# Altium PCB Rev5.PcbDoc (part 2 of 4)
Units mil, origin at the board's own origin, x right, y up, seen from the top; angles counter-clockwise.
Board outline 3019 x 2316 mil, 2 copper layers (Top Layer, Bottom Layer); 26 components, 37 nets, 159 pads, 132 vias.
Unrouted connection lines stored in the file: 2.
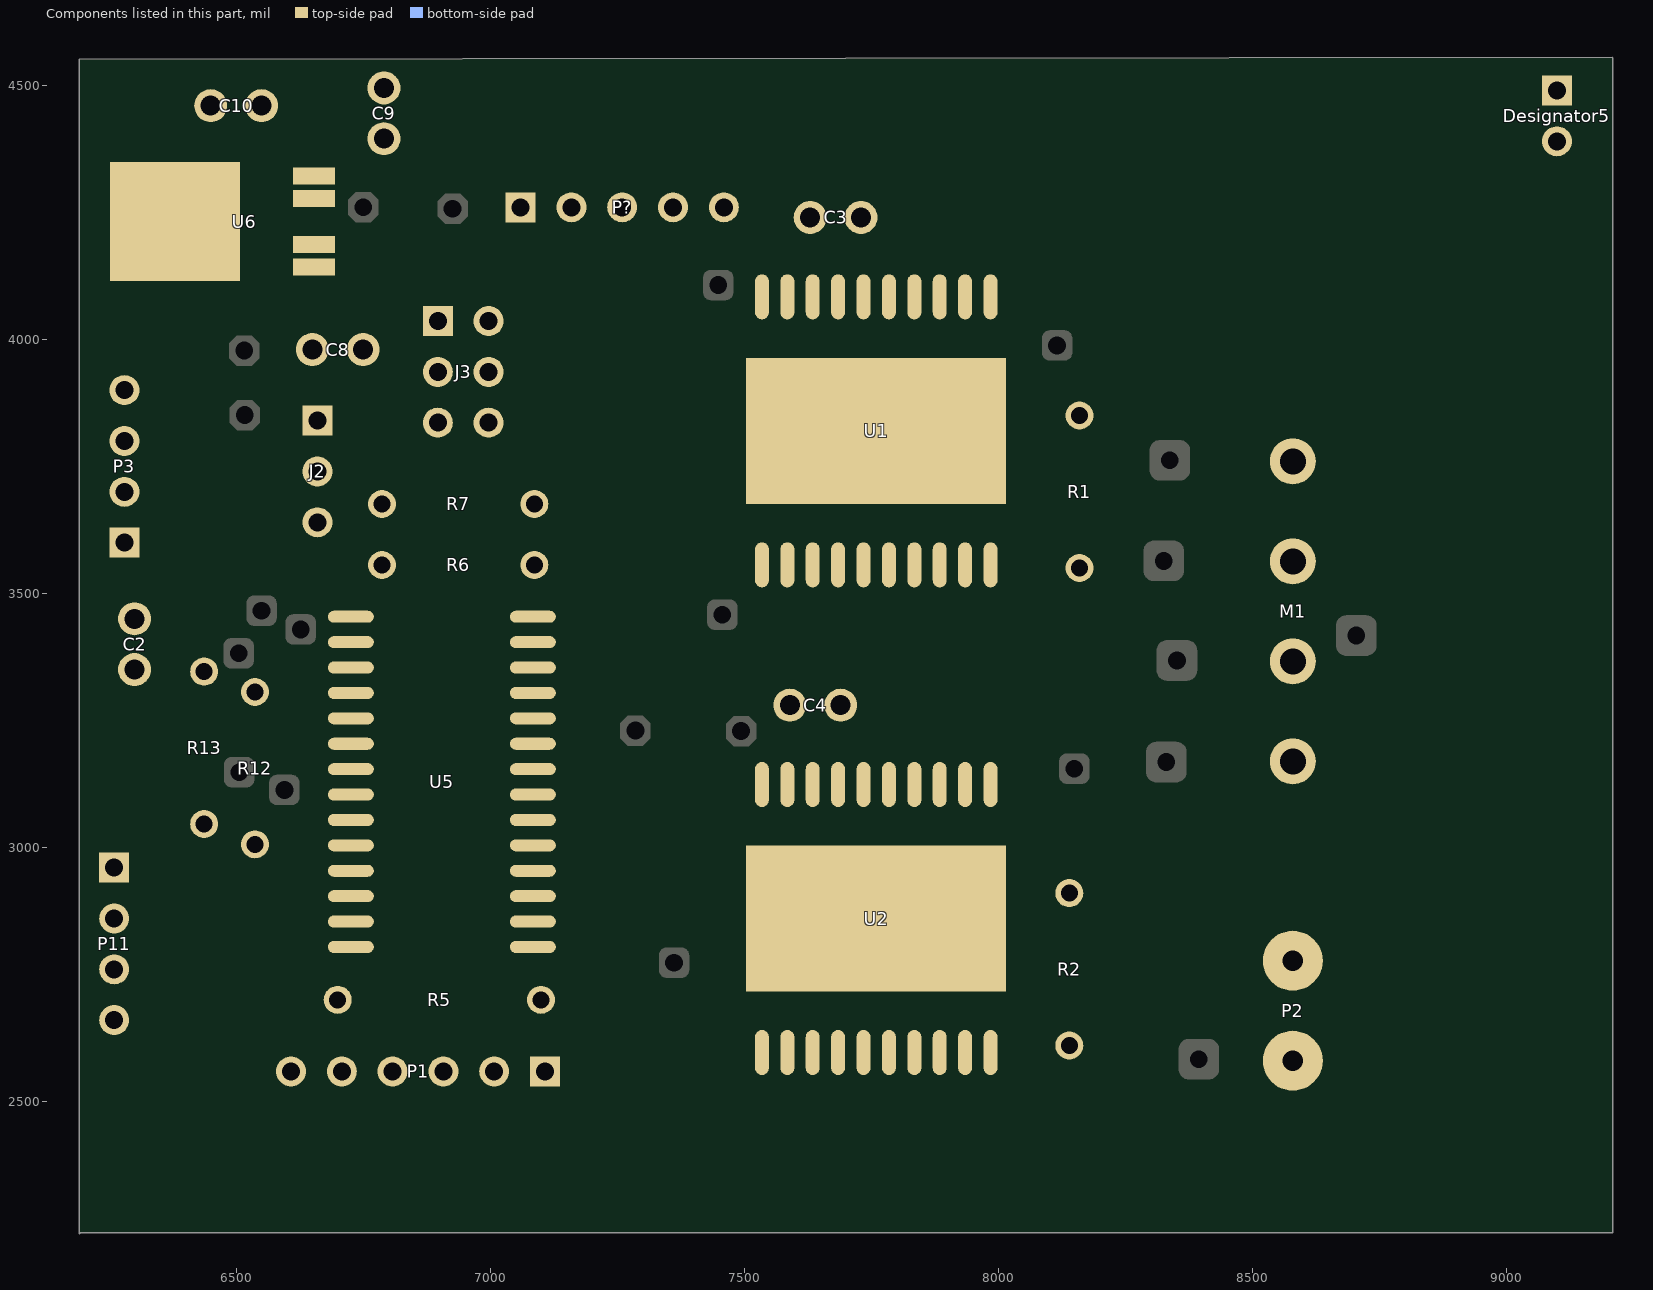
[diagram p2: the components of this part, seen from the top]

## Via types
v1: diameter 25.98, hole 12.99, Top Layer to Bottom Layer, tented top, 132 vias

## Nets (pads, with @x,y where several pads share a name; then routed paths per layer and width w, separated by ;. In a path a pad name is that pad's centre, name@x,y a point inside that pad or via, vN(x,y) a via of type N, cw(c..) or ccw(c..) an arc to the next point about the centre after c; other vN are vias at no path point) (continued)
copper on no net: | length 118851.7
  Top Layer w3: 8278.5,4156.5 8281,4156.5 ; 8278.5,4159 8283.5,4159 ; 8281,4161.5 8286,4161.5 ; 8283.5,4164 8291,4164 ; 8286,4166.5 8293.5,4166.5 ; 8288.5,4169 8296,4169 ; 8293.5,4171.5 8298.5,4171.5 ; 8296,4174 8303.5,4174 ; 8298.5,4176.5 8306,4176.5 ; 8301,4179 8308.5,4179 ; 8303.5,4181.5 8308.5,4181.5 ; 8306,4184 8311,4184 ; 8306,4186.5 8313.5,4186.5 ; 8308.5,4189 8313.5,4189 ; 8308.5,4191.5 8313.5,4191.5 ; 8311,4194 8316,4194 ; 8311,4196.5 8316,4196.5 ; 8311,4199 8316,4199 ; 8313.5,4201.5 8318.5,4201.5 ; 8313.5,4204 8318.5,4204 ; 8313.5,4206.5 8321,4206.5 ; 8316,4209 8321,4209 ; 8318.5,4211.5 8331,4211.5 ; 8318.5,4214 8328.5,4214 ; 8321,4216.5 8326,4216.5 ; 8323.5,4219 8331,4219 ; 8326,4209 8333.5,4209 ; 8326,4221.5 8353.5,4221.5 ; 8328.5,4206.5 8338.5,4206.5 ; 8328.5,4224 8343.5,4224 ; 8333.5,4204 8341,4204 ; 8336,4159 8343.5,4159 ; 8336,4161.5 8341,4161.5 ; 8336,4164 8341,4164 ; 8336,4166.5 8341,4166.5 ; 8336,4169 8341,4169 ; 8336,4171.5 8341,4171.5 ; 8336,4174 8343.5,4174 ; 8336,4201.5 8346,4201.5 ; 8336,4226.5 8341,4226.5 ; 8338.5,4156.5 8343.5,4156.5 ; 8338.5,4176.5 8343.5,4176.5 ; 8338.5,4179 8343.5,4179 ; 8338.5,4181.5 8346,4181.5 ; 8338.5,4199 8346,4199 ; 8338.5,4209 8341,4209 ; 8341,4154 8346,4154 ; 8341,4184 8346,4184 ; 8341,4186.5 8346,4186.5 ; 8341,4189 8348.5,4189 ; 8341,4196.5 8348.5,4196.5 ; 8341,4211.5 8343.5,4211.5 ; 8343.5,4151.5 8348.5,4151.5 ; 8343.5,4191.5 8348.5,4191.5 ; 8343.5,4194 8348.5,4194 ; 8343.5,4214 8346,4214 ; 8343.5,4216.5 8348.5,4216.5 ; 8343.5,4219 8351,4219 ; 8346,4149 8353.5,4149 ; 8348.5,4146.5 8361,4146.5 ; 8351,4224 8356,4224 ; 8353.5,4144 8368.5,4144 ; 8353.5,4226.5 8358.5,4226.5 ; 8356,4229 8361,4229 ; 8358.5,4141.5 8383.5,4141.5 ; 8358.5,4231.5 8361,4231.5 ; 8361,4234 8363.5,4234 ; 8361,4236.5 8366,4236.5 ; 8363.5,4239 8368.5,4239 ; 8366,4241.5 8371,4241.5 ; 8368.5,4244 8373.5,4244 ; 8371,4139 8411,4139 ; 8371,4246.5 8376,4246.5 ; 8373.5,4249 8378.5,4249 ; 8376,4251.5 8381,4251.5 ; 8378.5,4254 8386,4254 ; 8383.5,4256.5 8388.5,4256.5 ; 8386,4259 8391,4259 ; 8388.5,4024 8393.5,4024 ; 8388.5,4026.5 8393.5,4026.5 ; 8388.5,4261.5 8393.5,4261.5 ; 8391,4029 8396,4029 ; 8391,4031.5 8396,4031.5 ; 8391,4034 8396,4034 ; 8391,4136.5 8396,4136.5 ; 8391,4264 8396,4264 ; 8393.5,4036.5 8396,4036.5 ; 8393.5,4039 8398.5,4039 ; 8393.5,4041.5 8398.5,4041.5 ; 8393.5,4044 8398.5,4044 ; 8393.5,4266.5 8398.5,4266.5 ; 8396,4046.5 8398.5,4046.5 ; 8396,4049 8401,4049 ; 8396,4051.5 8401,4051.5 ; 8396,4054 8401,4054 ; 8396,4056.5 8401,4056.5 ; 8396,4059 8401,4059 ; 8396,4269 8401,4269 ; 8398.5,4061.5 8401,4061.5 ; 8398.5,4064 8403.5,4064 ; 8398.5,4066.5 8403.5,4066.5 ; 8398.5,4069 8403.5,4069 ; 8398.5,4071.5 8403.5,4071.5 ; 8398.5,4074 8403.5,4074 ; 8398.5,4076.5 8403.5,4076.5 ; 8398.5,4079 8403.5,4079 ; 8398.5,4081.5 8403.5,4081.5 ; 8398.5,4084 8403.5,4084 ; 8398.5,4086.5 8403.5,4086.5 ; 8398.5,4089 8403.5,4089 ; 8398.5,4091.5 8403.5,4091.5 ; 8398.5,4094 8403.5,4094 ; 8398.5,4096.5 8403.5,4096.5 ; 8398.5,4099 8403.5,4099 ; 8398.5,4101.5 8403.5,4101.5 ; 8398.5,4104 8403.5,4104 ; 8398.5,4106.5 8403.5,4106.5 ; 8398.5,4109 8411,4109 ; 8398.5,4111.5 8403.5,4111.5 ; 8398.5,4114 8401,4114 ; 8398.5,4116.5 8401,4116.5 ; 8398.5,4119 8403.5,4119 ; 8398.5,4121.5 8403.5,4121.5 ; 8398.5,4124 8403.5,4124 ; 8398.5,4126.5 8403.5,4126.5 ; 8398.5,4129 8403.5,4129 ; 8398.5,4271.5 8401,4271.5 ; 8398.5,4274 8403.5,4274 ; 8401,4131.5 8406,4131.5 ; 8401,4276.5 8406,4276.5 ; 8401,4279 8406,4279 ; 8403.5,4134 8406,4134 ; 8403.5,4136.5 8408.5,4136.5 ; 8403.5,4281.5 8406,4281.5 ; 8403.5,4284 8408.5,4284 ; 8406,4106.5 8421,4106.5 ; 8406,4141.5 8411,4141.5 ; 8406,4286.5 8408.5,4286.5 ; 8406,4289 8411,4289 ; 8406,4291.5 8411,4291.5 ; 8408.5,4144 8413.5,4144 ; 8408.5,4294 8413.5,4294 ; 8408.5,4296.5 8413.5,4296.5 ; 8411,4146.5 8413.5,4146.5 ; 8411,4299 8416,4299 ; 8413.5,4104 8433.5,4104 ; 8413.5,4149 8416,4149 ; 8413.5,4151.5 8416,4151.5 ; 8413.5,4301.5 8416,4301.5 ; 8413.5,4304 8418.5,4304 ; 8416,4154 8418.5,4154 ; 8416,4156.5 8418.5,4156.5 ; 8416,4306.5 8421,4306.5 ; 8416,4309 8421,4309 ; 8418.5,4159 8421,4159 ; 8418.5,4161.5 8423.5,4161.5 ; 8418.5,4311.5 8423.5,4311.5 ; 8418.5,4314 8423.5,4314 ; 8421,4164 8423.5,4164 ; 8421,4316.5 8426,4316.5 ; 8421,4319 8426,4319 ; 8423.5,4106.5 8441,4106.5 ; 8423.5,4166.5 8426,4166.5 ; 8423.5,4169 8428.5,4169 ; 8423.5,4321.5 8428.5,4321.5 ; 8423.5,4324 8428.5,4324 ; 8426,4171.5 8428.5,4171.5 ; 8426,4174 8431,4174 ; 8426,4326.5 8431,4326.5 ; 8426,4329 8431,4329 ; 8428.5,4176.5 8431,4176.5 ; 8428.5,4179 8433.5,4179 ; 8428.5,4331.5 8433.5,4331.5 ; 8428.5,4334 8433.5,4334 ; 8428.5,4336.5 8433.5,4336.5 ; 8431,4181.5 8433.5,4181.5 ; 8431,4184 8436,4184 ; 8431,4339 8436,4339 ; 8431,4341.5 8436,4341.5 ; 8433.5,4109 8446,4109 ; 8433.5,4186.5 8436,4186.5 ; 8433.5,4189 8438.5,4189 ; 8433.5,4344 8438.5,4344 ; 8433.5,4346.5 8438.5,4346.5 ; 8436,4191.5 8438.5,4191.5 ; 8436,4194 8441,4194 ; 8436,4349 8441,4349 ; 8436,4351.5 8441,4351.5 ; 8438.5,4196.5 8443.5,4196.5 ; 8438.5,4354 8443.5,4354 ; 8438.5,4356.5 8443.5,4356.5 ; 8441,4111.5 8466,4111.5 ; 8441,4199 8443.5,4199 ; 8441,4201.5 8446,4201.5 ; 8441,4359 8446,4359 ; 8443.5,4204 8448.5,4204 ; 8443.5,4206.5 8451,4206.5 ; 8443.5,4351.5 8446,4351.5 ; 8443.5,4361.5 8448.5,4361.5 ; 8443.5,4364 8451,4364 ; 8446,4114 8461,4114 ; 8446,4354 8448.5,4354 ; 8446,4366.5 8451,4366.5 ; 8448.5,4209 8453.5,4209 ; 8448.5,4356.5 8453.5,4356.5 ; 8448.5,4369 8453.5,4369 ; 8451,4211.5 8461,4211.5 ; 8451,4359 8456,4359 ; 8451,4371.5 8456,4371.5 ; 8451,4374 8458.5,4374 ; 8453.5,4361.5 8458.5,4361.5 ; 8453.5,4376.5 8458.5,4376.5 ; 8456,4214 8466,4214 ; 8456,4364 8461,4364 ; 8456,4379 8461,4379 ; 8456,4381.5 8461,4381.5 ; 8458.5,4366.5 8463.5,4366.5 ; 8458.5,4384 8463.5,4384 ; 8458.5,4386.5 8463.5,4386.5 ; 8461,4109 8476,4109 ; 8461,4369 8463.5,4369 ; 8461,4389 8466,4389 ; 8461,4391.5 8466,4391.5 ; 8463.5,4216.5 8471,4216.5 ; 8463.5,4371.5 8466,4371.5 ; 8463.5,4374 8468.5,4374 ; 8463.5,4394 8468.5,4394 ; 8463.5,4396.5 8468.5,4396.5 ; 8463.5,4399 8468.5,4399 ; 8466,4376.5 8471,4376.5 ; 8466,4401.5 8468.5,4401.5 ; 8466,4404 8471,4404 ; 8466,4406.5 8471,4406.5 ; 8468.5,4106.5 8481,4106.5 ; 8468.5,4219 8476,4219 ; 8468.5,4379 8471,4379 ; 8468.5,4381.5 8473.5,4381.5 ; 8468.5,4409 8473.5,4409 ; 8468.5,4411.5 8473.5,4411.5 ; 8471,4221.5 8478.5,4221.5 ; 8471,4354 8476,4354 ; 8471,4384 8476,4384 ; 8471,4386.5 8476,4386.5 ; 8471,4414 8473.5,4414 ; 8471,4416.5 8476,4416.5 ; 8473.5,4104 8483.5,4104 ; 8473.5,4356.5 8478.5,4356.5 ; 8473.5,4389 8478.5,4389 ; 8473.5,4391.5 8478.5,4391.5 ; 8473.5,4419 8476,4419 ; 8473.5,4421.5 8478.5,4421.5 ; 8476,4224 8481,4224 ; 8476,4359 8478.5,4359 ; 8476,4394 8481,4394 ; 8476,4396.5 8481,4396.5 ; 8476,4424 8481,4424 ; 8476,4426.5 8481,4426.5 ; 8478.5,4101.5 8486,4101.5 ; 8478.5,4109 8481,4109 ; 8478.5,4111.5 8483.5,4111.5 ; 8478.5,4226.5 8483.5,4226.5 ; 8478.5,4229 8483.5,4229 ; 8478.5,4361.5 8481,4361.5 ; 8478.5,4364 8483.5,4364 ; 8478.5,4399 8483.5,4399 ; 8478.5,4401.5 8483.5,4401.5 ; 8478.5,4429 8483.5,4429 ; 8481,4114 8488.5,4114 ; 8481,4231.5 8486,4231.5 ; 8481,4366.5 8486,4366.5 ; 8481,4404 8486,4404 ; 8481,4406.5 8486,4406.5 ; 8481,4431.5 8486,4431.5 ; 8483.5,4099 8491,4099 ; 8483.5,4116.5 8526,4116.5 ; 8483.5,4234 8488.5,4234 ; 8483.5,4369 8488.5,4369 ; 8483.5,4409 8486,4409 ; 8483.5,4411.5 8488.5,4411.5 ; 8483.5,4414 8488.5,4414 ; 8483.5,4434 8488.5,4434 ; 8483.5,4436.5 8488.5,4436.5 ; 8486,4096.5 8493.5,4096.5 ; 8486,4119 8531,4119 ; 8486,4236.5 8491,4236.5 ; 8486,4371.5 8488.5,4371.5 ; 8486,4416.5 8491,4416.5 ; 8486,4419 8491,4419 ; 8486,4439 8491,4439 ; 8488.5,4239 8491,4239 ; 8488.5,4241.5 8493.5,4241.5 ; 8488.5,4374 8491,4374 ; 8488.5,4376.5 8493.5,4376.5 ; 8488.5,4421.5 8493.5,4421.5 ; 8488.5,4424 8493.5,4424 ; 8488.5,4441.5 8491,4441.5 ; 8488.5,4444 8493.5,4444 ; 8491,4094 8496,4094 ; 8491,4244 8496,4244 ; 8491,4246.5 8496,4246.5 ; 8491,4379 8496,4379 ; 8491,4381.5 8496,4381.5 ; 8491,4426.5 8493.5,4426.5 ; 8491,4429 8496,4429 ; 8491,4446.5 8493.5,4446.5 ; 8491,4449 8496,4449 ; 8493.5,4091.5 8496,4091.5 ; 8493.5,4249 8498.5,4249 ; 8493.5,4251.5 8498.5,4251.5 ; 8493.5,4384 8498.5,4384 ; 8493.5,4431.5 8498.5,4431.5 ; 8493.5,4434 8498.5,4434 ; 8493.5,4451.5 8496,4451.5 ; 8493.5,4454 8498.5,4454 ; 8496,4254 8501,4254 ; 8496,4256.5 8501,4256.5 ; 8496,4386.5 8501,4386.5 ; 8496,4389 8501,4389 ; 8496,4436.5 8501,4436.5 ; 8496,4456.5 8498.5,4456.5 ; 8496,4459 8501,4459 ; 8498.5,4259 8503.5,4259 ; 8498.5,4261.5 8503.5,4261.5 ; 8498.5,4391.5 8503.5,4391.5 ; 8498.5,4439 8506,4439 ; 8498.5,4461.5 8503.5,4461.5 ; 8501,4264 8503.5,4264 ; 8501,4266.5 8506,4266.5 ; 8501,4269 8506,4269 ; 8501,4339 8503.5,4339 ; 8501,4394 8506,4394 ; 8501,4396.5 8506,4396.5 ; 8501,4441.5 8508.5,4441.5 ; 8501,4464 8506,4464 ; 8503.5,4271.5 8506,4271.5 ; 8503.5,4274 8508.5,4274 ; 8503.5,4276.5 8508.5,4276.5 ; 8503.5,4341.5 8506,4341.5 ; 8503.5,4399 8508.5,4399 ; 8503.5,4466.5 8511,4466.5 ; 8503.5,4469 8508.5,4469 ; 8506,4279 8571,4279 ; 8506,4281.5 8571,4281.5 ; 8506,4284 8571,4284 ; 8506,4286.5 8571,4286.5 ; 8506,4289 8571,4289 ; 8506,4344 8508.5,4344 ; 8506,4401.5 8508.5,4401.5 ; 8506,4404 8511,4404 ; 8506,4444 8513.5,4444 ; 8506,4471.5 8511,4471.5 ; 8508.5,4291.5 8571,4291.5 ; 8508.5,4294 8571,4294 ; 8508.5,4346.5 8511,4346.5 ; 8508.5,4349 8513.5,4349 ; 8508.5,4406.5 8513.5,4406.5 ; 8508.5,4409 8513.5,4409 ; 8508.5,4446.5 8516,4446.5 ; 8508.5,4464 8518.5,4464 ; 8508.5,4474 8511,4474 ; 8511,4274 8568.5,4274 ; 8511,4276.5 8571,4276.5 ; 8511,4296.5 8571,4296.5 ; 8511,4351.5 8516,4351.5 ; 8511,4411.5 8516,4411.5 ; 8511,4476.5 8513.5,4476.5 ; 8511,4479 8516,4479 ; 8513.5,4264 8568.5,4264 ; 8513.5,4266.5 8568.5,4266.5 ; 8513.5,4269 8568.5,4269 ; 8513.5,4271.5 8568.5,4271.5 ; 8513.5,4299 8571,4299 ; 8513.5,4414 8518.5,4414 ; 8513.5,4449 8521,4449 ; 8513.5,4461.5 8516,4461.5 ; 8513.5,4481.5 8518.5,4481.5 ; 8516,4256.5 8566,4256.5 ; 8516,4259 8566,4259 ; 8516,4261.5 8568.5,4261.5 ; 8516,4301.5 8573.5,4301.5 ; 8516,4354 8521,4354 ; 8516,4416.5 8523.5,4416.5 ; 8516,4451.5 8523.5,4451.5 ; 8516,4466.5 8523.5,4466.5 ; 8516,4484 8521,4484 ; 8518.5,4249 8568.5,4249 ; 8518.5,4251.5 8566,4251.5 ; 8518.5,4254 8566,4254 ; 8518.5,4304 8573.5,4304 ; 8518.5,4356.5 8526,4356.5 ; 8518.5,4419 8526,4419 ; 8518.5,4454 8526,4454 ; 8518.5,4469 8523.5,4469 ; 8518.5,4486.5 8528.5,4486.5 ; 8521,4244 8536,4244 ; 8521,4246.5 8568.5,4246.5 ; 8521,4306.5 8576,4306.5 ; 8521,4309 8576,4309 ; 8521,4359 8531,4359 ; 8521,4456.5 8528.5,4456.5 ; 8521,4471.5 8526,4471.5 ; 8521,4489 8523.5,4489 ; 8523.5,4236.5 8536,4236.5 ; 8523.5,4239 8536,4239 ; 8523.5,4241.5 8536,4241.5 ; 8523.5,4311.5 8576,4311.5 ; 8523.5,4314 8578.5,4314 ; 8523.5,4361.5 8533.5,4361.5 ; 8523.5,4421.5 8531,4421.5 ; 8523.5,4459 8531,4459 ; 8523.5,4474 8528.5,4474 ; 8523.5,4476.5 8528.5,4476.5 ; 8523.5,4484 8531,4484 ; 8526,4121.5 8536,4121.5 ; 8526,4229 8536,4229 ; 8526,4231.5 8536,4231.5 ; 8526,4234 8536,4234 ; 8526,4316.5 8578.5,4316.5 ; 8526,4319 8578.5,4319 ; 8526,4321.5 8581,4321.5 ; 8526,4364 8538.5,4364 ; 8526,4424 8533.5,4424 ; 8526,4461.5 8533.5,4461.5 ; 8526,4479 8531,4479 ; 8526,4481.5 8531,4481.5 ; 8528.5,4224 8538.5,4224 ; 8528.5,4226.5 8536,4226.5 ; 8528.5,4366.5 8543.5,4366.5 ; 8528.5,4464 8536,4464 ; 8531,4124 8538.5,4124 ; 8531,4216.5 8538.5,4216.5 ; 8531,4219 8538.5,4219 ; 8531,4221.5 8538.5,4221.5 ; 8531,4324 8583.5,4324 ; 8531,4369 8546,4369 ; 8531,4371.5 8551,4371.5 ; 8531,4426.5 8538.5,4426.5 ; 8531,4466.5 8538.5,4466.5 ; 8533.5,4211.5 8541,4211.5 ; 8533.5,4214 8541,4214 ; 8533.5,4374 8553.5,4374 ; 8533.5,4376.5 8558.5,4376.5 ; 8533.5,4429 8541,4429 ; 8533.5,4469 8541,4469 ; 8533.5,4471.5 8543.5,4471.5 ; 8533.5,4474 8538.5,4474 ; 8533.5,4481.5 8536,4481.5 ; 8536,4126.5 8543.5,4126.5 ; 8536,4204 8543.5,4204 ; 8536,4206.5 8543.5,4206.5 ; 8536,4209 8541,4209 ; 8536,4326.5 8583.5,4326.5 ; 8536,4379 8561,4379 ; 8536,4381.5 8568.5,4381.5 ; 8536,4476.5 8538.5,4476.5 ; 8538.5,4129 8548.5,4129 ; 8538.5,4194 8548.5,4194 ; 8538.5,4196.5 8548.5,4196.5 ; 8538.5,4199 8546,4199 ; 8538.5,4201.5 8543.5,4201.5 ; 8538.5,4244 8546,4244 ; 8538.5,4384 8578.5,4384 ; 8538.5,4386.5 8586,4386.5 ; 8538.5,4389 8621,4389 ; 8538.5,4431.5 8546,4431.5 ; 8541,4186.5 8558.5,4186.5 ; 8541,4189 8553.5,4189 ; 8541,4191.5 8551,4191.5 ; 8541,4239 8546,4239 ; 8541,4241.5 8546,4241.5 ; 8541,4329 8586,4329 ; 8541,4391.5 8811,4391.5 ; 8541,4394 8806,4394 ; 8541,4434 8548.5,4434 ; 8541,4474 8558.5,4474 ; 8543.5,4131.5 8553.5,4131.5 ; 8543.5,4176.5 8576,4176.5 ; 8543.5,4179 8576,4179 ; 8543.5,4181.5 8576,4181.5 ; 8543.5,4184 8563.5,4184 ; 8543.5,4226.5 8548.5,4226.5 ; 8543.5,4229 8548.5,4229 ; 8543.5,4231.5 8546,4231.5 ; 8543.5,4331.5 8588.5,4331.5 ; 8543.5,4396.5 8803.5,4396.5 ; 8543.5,4436.5 8551,4436.5 ; 8546,4166.5 8571,4166.5 ; 8546,4169 8576,4169 ; 8546,4171.5 8576,4171.5 ; 8546,4174 8576,4174 ; 8546,4219 8551,4219 ; 8546,4221.5 8551,4221.5 ; 8546,4224 8548.5,4224 ; 8546,4334 8591,4334 ; 8546,4399 8801,4399 ; 8546,4439 8553.5,4439 ; 8546,4476.5 8556,4476.5 ; 8548.5,4134 8558.5,4134 ; 8548.5,4161.5 8571,4161.5 ; 8548.5,4164 8571,4164 ; 8548.5,4216.5 8553.5,4216.5 ; 8548.5,4244 8568.5,4244 ; 8548.5,4336.5 8591,4336.5 ; 8548.5,4339 8593.5,4339 ; 8548.5,4401.5 8798.5,4401.5 ; 8548.5,4441.5 8558.5,4441.5 ; 8548.5,4479 8556,4479 ; 8551,4159 8566,4159 ; 8551,4214 8558.5,4214 ; 8551,4241.5 8553.5,4241.5 ; 8551,4341.5 8596,4341.5 ; 8551,4444 8561,4444 ; 8551,4471.5 8568.5,4471.5 ; 8553.5,4091.5 8558.5,4091.5 ; 8553.5,4094 8558.5,4094 ; 8553.5,4096.5 8558.5,4096.5 ; 8553.5,4099 8558.5,4099 ; 8553.5,4101.5 8558.5,4101.5 ; 8553.5,4104 8558.5,4104 ; 8553.5,4136.5 8568.5,4136.5 ; 8553.5,4156.5 8563.5,4156.5 ; 8553.5,4211.5 8566,4211.5 ; 8553.5,4404 8818.5,4404 ; 8553.5,4446.5 8566,4446.5 ; 8553.5,4481.5 8561,4481.5 ; 8556,4086.5 8561,4086.5 ; 8556,4089 8561,4089 ; 8556,4106.5 8558.5,4106.5 ; 8556,4109 8561,4109 ; 8556,4111.5 8561,4111.5 ; 8556,4114 8561,4114 ; 8556,4116.5 8561,4116.5 ; 8556,4344 8598.5,4344 ; 8556,4406.5 8801,4406.5 ; 8556,4449 8588.5,4449 ; 8556,4469 8563.5,4469 ; 8556,4484 8563.5,4484 ; 8558.5,4081.5 8563.5,4081.5 ; 8558.5,4084 8563.5,4084 ; 8558.5,4119 8563.5,4119 ; 8558.5,4121.5 8563.5,4121.5 ; 8558.5,4124 8563.5,4124 ; 8558.5,4241.5 8568.5,4241.5 ; 8558.5,4346.5 8601,4346.5 ; 8558.5,4409 8798.5,4409 ; 8558.5,4451.5 8576,4451.5 ; 8558.5,4486.5 8576,4486.5 ; 8561,4076.5 8568.5,4076.5 ; 8561,4079 8566,4079 ; 8561,4126.5 8566,4126.5 ; 8561,4129 8566,4129 ; 8561,4131.5 8566,4131.5 ; 8561,4134 8566,4134 ; 8561,4139 8568.5,4139 ; 8561,4209 8566,4209 ; 8561,4214 8566,4214 ; 8561,4216.5 8566,4216.5 ; 8561,4219 8566,4219 ; 8561,4221.5 8566,4221.5 ; 8561,4224 8566,4224 ; 8561,4226.5 8566,4226.5 ; 8561,4229 8566,4229 ; 8561,4231.5 8571,4231.5 ; 8561,4236.5 8568.5,4236.5 ; 8561,4239 8568.5,4239 ; 8561,4349 8601,4349 ; 8561,4411.5 8798.5,4411.5 ; 8561,4414 8828.5,4414 ; 8561,4489 8568.5,4489 ; 8563.5,4074 8568.5,4074 ; 8563.5,4234 8571,4234 ; 8563.5,4351.5 8603.5,4351.5 ; 8563.5,4416.5 8828.5,4416.5 ; 8563.5,4454 8578.5,4454 ; 8563.5,4474 8571,4474 ; 8566,4071.5 8571,4071.5 ; 8566,4141.5 8568.5,4141.5 ; 8566,4144 8568.5,4144 ; 8566,4146.5 8571,4146.5 ; 8566,4149 8571,4149 ; 8566,4151.5 8571,4151.5 ; 8566,4354 8606,4354 ; 8566,4419 8826,4419 ; 8566,4456.5 8581,4456.5 ; 8566,4476.5 8573.5,4476.5 ; 8568.5,4066.5 8576,4066.5 ; 8568.5,4069 8573.5,4069 ; 8568.5,4154 8571,4154 ; 8568.5,4156.5 8571,4156.5 ; 8568.5,4159 8571,4159 ; 8568.5,4184 8576,4184 ; 8568.5,4356.5 8606,4356.5 ; 8568.5,4421.5 8826,4421.5 ; 8568.5,4459 8798.5,4459 ; 8571,4064 8578.5,4064 ; 8571,4186.5 8576,4186.5 ; 8571,4359 8606,4359 ; 8571,4424 8823.5,4424 ; 8571,4461.5 8796,4461.5 ; 8571,4479 8573.5,4479 ; 8571,4484 8578.5,4484 ; 8573.5,4061.5 8581,4061.5 ; 8573.5,4159 8578.5,4159 ; 8573.5,4161.5 8578.5,4161.5 ; 8573.5,4164 8578.5,4164 ; 8573.5,4166.5 8578.5,4166.5 ; 8573.5,4426.5 8821,4426.5 ; 8573.5,4446.5 8583.5,4446.5 ; 8573.5,4464 8806,4464 ; 8573.5,4481.5 8581,4481.5 ; 8576,4059 8583.5,4059 ; 8576,4146.5 8581,4146.5 ; 8576,4149 8581,4149 ; 8576,4151.5 8581,4151.5 ; 8576,4154 8581,4154 ; 8576,4156.5 8578.5,4156.5 ; 8576,4361.5 8606,4361.5 ; 8576,4381.5 8581,4381.5 ; 8576,4444 8578.5,4444 ; 8576,4466.5 8581,4466.5 ; 8576,4469 8581,4469 ; 8576,4471.5 8581,4471.5 ; 8576,4474 8581,4474 ; 8576,4476.5 8581,4476.5 ; 8576,4479 8581,4479 ; 8578.5,4056.5 8586,4056.5 ; 8578.5,4139 8583.5,4139 ; 8578.5,4141.5 8583.5,4141.5 ; 8578.5,4144 8581,4144 ; 8578.5,4379 8618.5,4379 ; 8578.5,4429 8821,4429 ; 8581,4054 8588.5,4054 ; 8581,4134 8586,4134 ; 8581,4136.5 8586,4136.5 ; 8581,4364 8606,4364 ; 8581,4376.5 8593.5,4376.5 ; 8581,4431.5 8818.5,4431.5 ; 8583.5,4051.5 8591,4051.5 ; 8583.5,4129 8591,4129 ; 8583.5,4131.5 8588.5,4131.5 ; 8583.5,4434 8818.5,4434 ; 8583.5,4451.5 8588.5,4451.5 ; 8586,4126.5 8593.5,4126.5 ; 8586,4366.5 8606,4366.5 ; 8586,4436.5 8816,4436.5 ; 8586,4454 8803.5,4454 ; 8586,4456.5 8801,4456.5 ; 8588.5,4049 8596,4049 ; 8588.5,4124 8596,4124 ; 8588.5,4439 8816,4439 ; 8591,4046.5 8598.5,4046.5 ; 8591,4121.5 8598.5,4121.5 ; 8591,4369 8606,4369 ; 8591,4441.5 8813.5,4441.5 ; 8591,4444 8811,4444 ; 8593.5,4044 8603.5,4044 ; 8593.5,4119 8601,4119 ; 8593.5,4371.5 8618.5,4371.5 ; 8593.5,4386.5 8621,4386.5 ; 8593.5,4446.5 8811,4446.5 ; 8593.5,4449 8808.5,4449 ; 8593.5,4451.5 8806,4451.5 ; 8596,4374 8618.5,4374 ; 8596,4376.5 8618.5,4376.5 ; 8596,4381.5 8618.5,4381.5 ; 8596,4384 8618.5,4384 ; 8596,4466.5 8788.5,4466.5 ; 8598.5,4041.5 8606,4041.5 ; 8598.5,4116.5 8606,4116.5 ; 8601,4039 8611,4039 ; 8601,4114 8608.5,4114 ; 8601,4469 8786,4469 ; 8603.5,4111.5 8611,4111.5 ; 8603.5,4289 8606,4289 ; 8603.5,4291.5 8608.5,4291.5 ; 8606,4036.5 8616,4036.5 ; 8606,4109 8613.5,4109 ; 8606,4294 8608.5,4294 ; 8606,4296.5 8611,4296.5 ; 8606,4299 8611,4299 ; 8606,4471.5 8783.5,4471.5 ; 8608.5,4301.5 8613.5,4301.5 ; 8608.5,4304 8613.5,4304 ; 8608.5,4366.5 8621,4366.5 ; 8608.5,4369 8618.5,4369 ; 8608.5,4474 8778.5,4474 ; 8611,4034 8623.5,4034 ; 8611,4106.5 8616,4106.5 ; 8611,4306.5 8616,4306.5 ; 8611,4309 8616,4309 ; 8611,4361.5 8621,4361.5 ; 8611,4364 8621,4364 ; 8613.5,4104 8621,4104 ; 8613.5,4311.5 8618.5,4311.5 ; 8613.5,4314 8618.5,4314 ; 8613.5,4359 8623.5,4359 ; 8613.5,4476.5 8776,4476.5 ; 8616,4031.5 8631,4031.5 ; 8616,4101.5 8623.5,4101.5 ; 8616,4316.5 8621,4316.5 ; 8616,4356.5 8623.5,4356.5 ; 8616,4479 8771,4479 ; 8618.5,4099 8626,4099 ; 8618.5,4319 8621,4319 ; 8618.5,4354 8623.5,4354 ; 8618.5,4481.5 8766,4481.5 ; 8621,4346.5 8623.5,4346.5 ; 8621,4349 8623.5,4349 ; 8621,4351.5 8623.5,4351.5 ; 8621,4484 8763.5,4484 ; 8623.5,4029 8638.5,4029 ; 8623.5,4096.5 8628.5,4096.5 ; 8623.5,4486.5 8758.5,4486.5 ; 8626,4094 8633.5,4094 ; 8626,4489 8753.5,4489 ; 8628.5,4091.5 8636,4091.5 ; 8628.5,4281.5 8631,4281.5 ; 8628.5,4284 8636,4284 ; 8628.5,4324 8686,4324 ; 8628.5,4326.5 8688.5,4326.5 ; 8628.5,4329 8688.5,4329 ; 8628.5,4331.5 8686,4331.5 ; 8628.5,4389 8816,4389 ; 8628.5,4491.5 8748.5,4491.5 ; 8631,4026.5 8656,4026.5 ; 8631,4089 8638.5,4089 ; 8631,4101.5 8633.5,4101.5 ; 8631,4286.5 8638.5,4286.5 ; 8631,4289 8678.5,4289 ; 8631,4296.5 8636,4296.5 ; 8631,4299 8641,4299 ; 8631,4334 8661,4334 ; 8631,4336.5 8656,4336.5 ; 8633.5,4099 8638.5,4099 ; 8633.5,4291.5 8683.5,4291.5 ; 8633.5,4294 8668.5,4294 ; 8633.5,4339 8651,4339 ; 8633.5,4341.5 8643.5,4341.5 ; 8633.5,4386.5 8823.5,4386.5 ; 8633.5,4494 8743.5,4494 ; 8636,4086.5 8641,4086.5 ; 8636,4096.5 8641,4096.5 ; 8636,4301.5 8646,4301.5 ; 8636,4321.5 8683.5,4321.5 ; 8636,4381.5 8836,4381.5 ; 8636,4384 8831,4384 ; 8636,4496.5 8738.5,4496.5 ; 8638.5,4084 8643.5,4084 ; 8638.5,4094 8646,4094 ; 8638.5,4296.5 8676,4296.5 ; 8638.5,4376.5 8846,4376.5 ; 8638.5,4379 8841,4379 ; 8641,4076.5 8646,4076.5 ; 8641,4079 8646,4079 ; 8641,4081.5 8646,4081.5 ; 8641,4091.5 8651,4091.5 ; 8641,4304 8648.5,4304 ; 8641,4371.5 8851,4371.5 ; 8641,4374 8848.5,4374 ; 8641,4499 8731,4499 ; 8643.5,4024 8661,4024 ; 8643.5,4056.5 8648.5,4056.5 ; 8643.5,4059 8648.5,4059 ; 8643.5,4061.5 8648.5,4061.5 ; 8643.5,4064 8648.5,4064 ; 8643.5,4066.5 8648.5,4066.5 ; 8643.5,4069 8648.5,4069 ; 8643.5,4071.5 8646,4071.5 ; 8643.5,4074 8646,4074 ; 8643.5,4299 8671,4299 ; 8643.5,4306.5 8651,4306.5 ; 8643.5,4369 8846,4369 ; 8643.5,4501.5 8726,4501.5 ; 8646,4029 8651,4029 ; 8646,4031.5 8651,4031.5 ; 8646,4034 8651,4034 ; 8646,4036.5 8651,4036.5 ; 8646,4039 8651,4039 ; 8646,4041.5 8651,4041.5 ; 8646,4044 8651,4044 ; 8646,4046.5 8651,4046.5 ; 8646,4049 8678.5,4049 ; 8646,4051.5 8651,4051.5 ; 8646,4054 8651,4054 ; 8646,4089 8668.5,4089 ; 8646,4366.5 8846,4366.5 ; 8648.5,4301.5 8681,4301.5 ; 8648.5,4309 8656,4309 ; 8651,4276.5 8668.5,4276.5 ; 8651,4311.5 8661,4311.5 ; 8651,4504 8716,4504 ; 8653.5,4006.5 8656,4006.5 ; 8653.5,4009 8656,4009 ; 8653.5,4011.5 8658.5,4011.5 ; 8653.5,4014 8658.5,4014 ; 8653.5,4016.5 8658.5,4016.5 ; 8653.5,4086.5 8678.5,4086.5 ; 8653.5,4304 8673.5,4304 ; 8656,4019 8658.5,4019 ; 8656,4021.5 8658.5,4021.5 ; 8656,4046.5 8711,4046.5 ; 8656,4251.5 8661,4251.5 ; 8656,4279 8673.5,4279 ; 8656,4314 8666,4314 ; 8656,4319 8683.5,4319 ; 8658.5,4254 8671,4254 ; 8658.5,4364 8848.5,4364 ; 8658.5,4506.5 8683.5,4506.5 ; 8661,4316.5 8676,4316.5 ; 8663.5,4256.5 8673.5,4256.5 ; 8666,4084 8688.5,4084 ; 8666,4361.5 8848.5,4361.5 ; 8668.5,4176.5 8673.5,4176.5 ; 8668.5,4179 8673.5,4179 ; 8668.5,4259 8678.5,4259 ; 8668.5,4281.5 8686,4281.5 ; 8671,4181.5 8676,4181.5 ; 8671,4184 8676,4184 ; 8671,4214 8673.5,4214 ; 8671,4216.5 8673.5,4216.5 ; 8671,4219 8676,4219 ; 8671,4221.5 8676,4221.5 ; 8671,4294 8681,4294 ; 8673.5,4186.5 8678.5,4186.5 ; 8673.5,4189 8678.5,4189 ; 8673.5,4224 8683.5,4224 ; 8673.5,4226.5 8683.5,4226.5 ; 8673.5,4261.5 8681,4261.5 ; 8673.5,4284 8686,4284 ; 8673.5,4299 8683.5,4299 ; 8673.5,4359 8848.5,4359 ; 8676,4191.5 8681,4191.5 ; 8676,4194 8681,4194 ; 8676,4229 8683.5,4229 ; 8678.5,4081.5 8698.5,4081.5 ; 8678.5,4196.5 8683.5,4196.5 ; 8678.5,4231.5 8683.5,4231.5 ; 8678.5,4264 8683.5,4264 ; 8678.5,4314 8686,4314 ; 8678.5,4316.5 8683.5,4316.5 ; 8678.5,4356.5 8848.5,4356.5 ; 8681,4049 8683.5,4049 ; 8681,4199 8686,4199 ; 8681,4219 8686,4219 ; 8681,4221.5 8683.5,4221.5 ; 8681,4234 8686,4234 ; 8681,4311.5 8693.5,4311.5 ; 8681,4354 8848.5,4354 ; 8683.5,4164 8696,4164 ; 8683.5,4166.5 8751,4166.5 ; 8683.5,4201.5 8686,4201.5 ; 8683.5,4216.5 8688.5,4216.5 ; 8683.5,4236.5 8688.5,4236.5 ; 8683.5,4266.5 8686,4266.5 ; 8686,4049 8711,4049 ; 8686,4079 8713.5,4079 ; 8686,4161.5 8691,4161.5 ; 8686,4214 8696,4214 ; 8686,4351.5 8766,4351.5 ; 8688.5,4159 8696,4159 ; 8688.5,4169 8691,4169 ; 8688.5,4171.5 8693.5,4171.5 ; 8688.5,4239 8696,4239 ; 8688.5,4309 8693.5,4309 ; 8688.5,4314 8696,4314 ; 8691,4156.5 8698.5,4156.5 ; 8691,4174 8693.5,4174 ; 8691,4176.5 8698.5,4176.5 ; 8691,4216.5 8711,4216.5 ; 8691,4241.5 8696,4241.5 ; 8691,4244 8696,4244 ; 8691,4246.5 8696,4246.5 ; 8691,4249 8696,4249 ; 8691,4251.5 8696,4251.5 ; 8691,4254 8696,4254 ; 8691,4316.5 8698.5,4316.5 ; 8691,4349 8768.5,4349 ; 8693.5,4179 8701,4179 ; 8693.5,4219 8711,4219 ; 8693.5,4256.5 8696,4256.5 ; 8693.5,4276.5 8698.5,4276.5 ; 8693.5,4279 8698.5,4279 ; 8693.5,4304 8698.5,4304 ; 8693.5,4306.5 8696,4306.5 ; 8693.5,4319 8698.5,4319 ; 8693.5,4346.5 8766,4346.5 ; 8696,4154 8703.5,4154 ; 8696,4181.5 8703.5,4181.5 ; 8696,4221.5 8708.5,4221.5 ; 8696,4281.5 8698.5,4281.5 ; 8696,4301.5 8701,4301.5 ; 8696,4321.5 8701,4321.5 ; 8696,4334 8701,4334 ; 8696,4336.5 8701,4336.5 ; 8696,4339 8701,4339 ; 8696,4341.5 8716,4341.5 ; 8696,4344 8716,4344 ; 8698.5,4076.5 8736,4076.5 ; 8698.5,4119 8706,4119 ; 8698.5,4151.5 8708.5,4151.5 ; 8698.5,4169 8741,4169 ; 8698.5,4284 8701,4284 ; 8698.5,4286.5 8703.5,4286.5 ; 8698.5,4296.5 8706,4296.5 ; 8698.5,4299 8703.5,4299 ; 8698.5,4324 8703.5,4324 ; 8698.5,4326.5 8703.5,4326.5 ; 8698.5,4329 8703.5,4329 ; 8698.5,4331.5 8701,4331.5 ; 8701,4121.5 8711,4121.5 ; 8701,4184 8718.5,4184 ; 8701,4224 8703.5,4224 ; 8701,4289 8706,4289 ; 8701,4291.5 8706,4291.5 ; 8701,4294 8706,4294 ; 8701,4309 8736,4309 ; 8703.5,4149 8718.5,4149 ; 8703.5,4186.5 8711,4186.5 ; 8706,4124 8716,4124 ; 8706,4171.5 8733.5,4171.5 ; 8706,4339 8713.5,4339 ; 8708.5,4126.5 8731,4126.5 ; 8708.5,4146.5 8731,4146.5 ; 8708.5,4214 8716,4214 ; 8708.5,4306.5 8726,4306.5 ; 8708.5,4311.5 8713.5,4311.5 ; 8708.5,4336.5 8711,4336.5 ; 8711,4181.5 8726,4181.5 ; 8711,4211.5 8726,4211.5 ; 8713.5,4074 8731,4074 ; 8713.5,4326.5 8721,4326.5 ; 8716,4049 8738.5,4049 ; 8716,4051.5 8748.5,4051.5 ; 8716,4129 8726,4129 ; 8716,4321.5 8721,4321.5 ; 8716,4324 8721,4324 ; 8716,4329 8721,4329 ; 8716,4331.5 8721,4331.5 ; 8716,4334 8721,4334 ; 8716,4336.5 8721,4336.5 ; 8718.5,4144 8721,4144 ; 8718.5,4179 8721,4179 ; 8718.5,4316.5 8723.5,4316.5 ; 8718.5,4319 8723.5,4319 ; 8718.5,4339 8721,4339 ; 8718.5,4341.5 8743.5,4341.5 ; 8718.5,4344 8763.5,4344 ; 8721,4184 8736,4184 ; 8721,4214 8728.5,4214 ; 8721,4294 8728.5,4294 ; 8721,4311.5 8726,4311.5 ; 8721,4314 8726,4314 ; 8723.5,4149 8736,4149 ; 8723.5,4291.5 8731,4291.5 ; 8723.5,4296.5 8728.5,4296.5 ; 8723.5,4299 8728.5,4299 ; 8726,4124 8736,4124 ; 8726,4186.5 8733.5,4186.5 ; 8726,4216.5 8731,4216.5 ; 8726,4289 8733.5,4289 ; 8726,4301.5 8731,4301.5 ; 8726,4339 8746,4339 ; 8728.5,4286.5 8736,4286.5 ; 8728.5,4304 8731,4304 ; 8728.5,4306.5 8733.5,4306.5 ; 8728.5,4311.5 8738.5,4311.5 ; 8731,4121.5 8741,4121.5 ; 8731,4151.5 8738.5,4151.5 ; 8731,4219 8743.5,4219 ; 8731,4284 8738.5,4284 ; 8731,4336.5 8748.5,4336.5 ; 8733.5,4079 8741,4079 ; 8733.5,4181.5 8741,4181.5 ; 8733.5,4221.5 8741,4221.5 ; 8733.5,4281.5 8738.5,4281.5 ; 8733.5,4334 8736,4334 ; 8736,4054 8756,4054 ; 8736,4081.5 8746,4081.5 ; 8736,4119 8743.5,4119 ; 8736,4154 8743.5,4154 ; 8736,4179 8743.5,4179 ; 8736,4224 8738.5,4224 ; 8736,4256.5 8741,4256.5 ; 8736,4259 8738.5,4259 ; 8736,4279 8741,4279 ; 8736,4299 8781,4299 ; 8736,4314 8738.5,4314 ; 8738.5,4156.5 8746,4156.5 ; 8738.5,4249 8743.5,4249 ; 8738.5,4251.5 8743.5,4251.5 ; 8738.5,4254 8741,4254 ; 8738.5,4276.5 8741,4276.5 ; 8738.5,4316.5 8781,4316.5 ; 8738.5,4319 8778.5,4319 ; 8738.5,4321.5 8793.5,4321.5 ; 8738.5,4324 8793.5,4324 ; 8738.5,4326.5 8793.5,4326.5 ; 8738.5,4329 8793.5,4329 ; 8741,4084 8748.5,4084 ; 8741,4176.5 8746,4176.5 ; 8741,4216.5 8753.5,4216.5 ; 8741,4234 8743.5,4234 ; 8741,4236.5 8751,4236.5 ; 8741,4239 8748.5,4239 ; 8741,4241.5 8746,4241.5 ; 8741,4244 8746,4244 ; 8741,4246.5 8746,4246.5 ; 8741,4294 8751,4294 ; 8741,4301.5 8751,4301.5 ; 8743.5,4159 8746,4159 ; 8743.5,4161.5 8748.5,4161.5 ; 8743.5,4174 8748.5,4174 ; 8743.5,4214 8753.5,4214 ; 8743.5,4296.5 8751,4296.5 ; 8746,4056.5 8761,4056.5 ; 8746,4086.5 8751,4086.5 ; 8746,4164 8751,4164 ; 8746,4171.5 8751,4171.5 ; 8746,4261.5 8751,4261.5 ; 8746,4284 8758.5,4284 ; 8746,4291.5 8751,4291.5 ; 8746,4304 8761,4304 ; 8746,4334 8753.5,4334 ; 8748.5,4089 8753.5,4089 ; 8748.5,4169 8751,4169 ; 8748.5,4234 8758.5,4234 ; 8748.5,4259 8753.5,4259 ; 8748.5,4331.5 8753.5,4331.5 ; 8748.5,4341.5 8763.5,4341.5 ; 8751,4091.5 8756,4091.5 ; 8751,4219 8756,4219 ; 8751,4231.5 8758.5,4231.5 ; 8751,4254 8758.5,4254 ; 8751,4256.5 8756,4256.5 ; 8751,4281.5 8778.5,4281.5 ; 8751,4306.5 8781,4306.5 ; 8753.5,4059 8763.5,4059 ; 8753.5,4094 8758.5,4094 ; 8753.5,4221.5 8761,4221.5 ; 8753.5,4224 8761,4224 ; 8753.5,4236.5 8758.5,4236.5 ; 8753.5,4251.5 8761,4251.5 ; 8753.5,4291.5 8773.5,4291.5 ; 8753.5,4301.5 8776,4301.5 ; 8753.5,4339 8761,4339 ; 8756,4096.5 8761,4096.5 ; 8756,4226.5 8761,4226.5 ; 8756,4229 8761,4229 ; 8756,4294 8793.5,4294 ; 8756,4296.5 8793.5,4296.5 ; 8758.5,4061.5 8768.5,4061.5 ; 8758.5,4099 8763.5,4099 ; 8758.5,4249 8761,4249 ; 8758.5,4279 8773.5,4279 ; 8758.5,4309 8773.5,4309 ; 8758.5,4336.5 8761,4336.5 ; 8761,4101.5 8766,4101.5 ; 8761,4199 8766,4199 ; 8761,4201.5 8763.5,4201.5 ; 8763.5,4064 8771,4064 ; 8763.5,4104 8768.5,4104 ; 8763.5,4194 8768.5,4194 ; 8763.5,4196.5 8768.5,4196.5 ; 8763.5,4331.5 8793.5,4331.5 ; 8766,4066.5 8773.5,4066.5 ; 8766,4106.5 8771,4106.5 ; 8766,4189 8771,4189 ; 8766,4191.5 8768.5,4191.5 ; 8768.5,4004 8771,4004 ; 8768.5,4006.5 8771,4006.5 ; 8768.5,4009 8771,4009 ; 8768.5,4011.5 8773.5,4011.5 ; 8768.5,4014 8773.5,4014 ; 8768.5,4016.5 8773.5,4016.5 ; 8768.5,4019 8773.5,4019 ; 8768.5,4021.5 8776,4021.5 ; 8768.5,4069 8776,4069 ; 8768.5,4109 8773.5,4109 ; 8768.5,4111.5 8776,4111.5 ; 8768.5,4184 8771,4184 ; 8768.5,4186.5 8771,4186.5 ; 8771,4024 8776,4024 ; 8771,4026.5 8776,4026.5 ; 8771,4029 8776,4029 ; 8771,4031.5 8776,4031.5 ; 8771,4034 8778.5,4034 ; 8771,4071.5 8778.5,4071.5 ; 8771,4114 8776,4114 ; 8771,4334 8791,4334 ; 8773.5,4036.5 8778.5,4036.5 ; 8773.5,4039 8778.5,4039 ; 8773.5,4041.5 8778.5,4041.5 ; 8773.5,4044 8781,4044 ; 8773.5,4074 8781,4074 ; 8773.5,4116.5 8778.5,4116.5 ; 8773.5,4304 8783.5,4304 ; 8773.5,4351.5 8848.5,4351.5 ; 8776,4046.5 8781,4046.5 ; 8776,4049 8781,4049 ; 8776,4051.5 8781,4051.5 ; 8776,4054 8783.5,4054 ; 8776,4076.5 8783.5,4076.5 ; 8776,4119 8781,4119 ; 8776,4121.5 8781,4121.5 ; 8776,4284 8781,4284 ; 8776,4314 8786,4314 ; 8778.5,4056.5 8783.5,4056.5 ; 8778.5,4059 8783.5,4059 ; 8778.5,4061.5 8783.5,4061.5 ; 8778.5,4079 8788.5,4079 ; 8778.5,4124 8783.5,4124 ; 8778.5,4126.5 8783.5,4126.5 ; 8778.5,4336.5 8791,4336.5 ; 8778.5,4349 8848.5,4349 ; 8781,4064 8786,4064 ; 8781,4066.5 8786,4066.5 ; 8781,4069 8786,4069 ; 8781,4071.5 8786,4071.5 ; 8781,4081.5 8791,4081.5 ; 8781,4129 8786,4129 ; 8781,4131.5 8793.5,4131.5 ; 8781,4301.5 8788.5,4301.5 ; 8781,4311.5 8791,4311.5 ; 8783.5,4074 8786,4074 ; 8783.5,4084 8791,4084 ; 8783.5,4086.5 8791,4086.5 ; 8783.5,4134 8793.5,4134 ; 8783.5,4136.5 8793.5,4136.5 ; 8783.5,4291.5 8788.5,4291.5 ; 8783.5,4299 8791,4299 ; 8783.5,4339 8788.5,4339 ; 8783.5,4346.5 8793.5,4346.5 ; 8786,4076.5 8788.5,4076.5 ; 8786,4089 8798.5,4089 ; 8786,4139 8793.5,4139 ; 8786,4289 8791,4289 ; 8786,4309 8793.5,4309 ; 8788.5,4091.5 8798.5,4091.5 ; 8788.5,4094 8796,4094 ; 8788.5,4096.5 8793.5,4096.5 ; 8788.5,4099 8793.5,4099 ; 8788.5,4101.5 8793.5,4101.5 ; 8788.5,4104 8793.5,4104 ; 8788.5,4106.5 8793.5,4106.5 ; 8788.5,4109 8793.5,4109 ; 8788.5,4111.5 8793.5,4111.5 ; 8788.5,4114 8793.5,4114 ; 8788.5,4116.5 8793.5,4116.5 ; 8788.5,4119 8793.5,4119 ; 8788.5,4121.5 8793.5,4121.5 ; 8788.5,4124 8793.5,4124 ; 8788.5,4126.5 8793.5,4126.5 ; 8788.5,4129 8793.5,4129 ; 8788.5,4141.5 8793.5,4141.5 ; 8788.5,4144 8796,4144 ; 8788.5,4286.5 8793.5,4286.5 ; 8788.5,4306.5 8796,4306.5 ; 8788.5,4344 8796,4344 ; 8791,4146.5 8796,4146.5 ; 8791,4149 8798.5,4149 ; 8791,4476.5 8796,4476.5 ; 8791,4479 8793.5,4479 ; 8791,4481.5 8796,4481.5 ; 8793.5,4151.5 8798.5,4151.5 ; 8793.5,4466.5 8803.5,4466.5 ; 8793.5,4469 8801,4469 ; 8793.5,4471.5 8798.5,4471.5 ; 8793.5,4474 8796,4474 ; 8793.5,4484 8803.5,4484 ; 8796,4086.5 8801,4086.5 ; 8796,4154 8801,4154 ; 8796,4156.5 8803.5,4156.5 ; 8796,4486.5 8811,4486.5 ; 8798.5,4084 8803.5,4084 ; 8798.5,4159 8803.5,4159 ; 8798.5,4311.5 8803.5,4311.5 ; 8798.5,4314 8803.5,4314 ; 8798.5,4316.5 8801,4316.5 ; 8798.5,4319 8801,4319 ; 8798.5,4344 8851,4344 ; 8798.5,4346.5 8851,4346.5 ; 8798.5,4479 8831,4479 ; 8798.5,4481.5 8803.5,4481.5 ; 8798.5,4489 8806,4489 ; 8801,4079 8808.5,4079 ; 8801,4081.5 8806,4081.5 ; 8801,4161.5 8806,4161.5 ; 8801,4164 8806,4164 ; 8801,4301.5 8806,4301.5 ; 8801,4304 8806,4304 ; 8801,4306.5 8806,4306.5 ; 8801,4309 8803.5,4309 ; 8801,4341.5 8851,4341.5 ; 8801,4476.5 8816,4476.5 ; 8803.5,4076.5 8811,4076.5 ; 8803.5,4166.5 8808.5,4166.5 ; 8803.5,4169 8808.5,4169 ; 8803.5,4289 8808.5,4289 ; 8803.5,4291.5 8808.5,4291.5 ; 8803.5,4294 8808.5,4294 ; 8803.5,4296.5 8808.5,4296.5 ; 8803.5,4299 8806,4299 ; 8803.5,4334 8851,4334 ; 8803.5,4336.5 8851,4336.5 ; 8803.5,4339 8851,4339 ; 8803.5,4401.5 8816,4401.5 ; 8803.5,4461.5 8811,4461.5 ; 8806,4074 8813.5,4074 ; 8806,4171.5 8811,4171.5 ; 8806,4174 8811,4174 ; 8806,4176.5 8816,4176.5 ; 8806,4284 8808.5,4284 ; 8806,4286.5 8808.5,4286.5 ; 8806,4329 8851,4329 ; 8806,4331.5 8851,4331.5 ; 8806,4459 8816,4459 ; 8806,4484 8818.5,4484 ; 8808.5,4179 8813.5,4179 ; 8808.5,4181.5 8813.5,4181.5 ; 8808.5,4184 8813.5,4184 ; 8808.5,4186.5 8813.5,4186.5 ; 8808.5,4189 8813.5,4189 ; 8808.5,4324 8851,4324 ; 8808.5,4326.5 8851,4326.5 ; 8808.5,4481.5 8826,4481.5 ; 8811,4071.5 8818.5,4071.5 ; 8811,4191.5 8816,4191.5 ; 8811,4194 8816,4194 ; 8811,4196.5 8816,4196.5 ; 8811,4199 8816,4199 ; 8811,4201.5 8816,4201.5 ; 8811,4204 8816,4204 ; 8811,4206.5 8816,4206.5 ; 8811,4316.5 8851,4316.5 ; 8811,4319 8851,4319 ; 8811,4321.5 8851,4321.5 ; 8811,4411.5 8831,4411.5 ; 8811,4456.5 8821,4456.5 ; 8811,4491.5 8816,4491.5 ; 8811,4494 8816,4494 ; 8811,4496.5 8813.5,4496.5 ; 8811,4499 8813.5,4499 ; 8811,4501.5 8816,4501.5 ; 8813.5,4069 8823.5,4069 ; 8813.5,4171.5 8818.5,4171.5 ; 8813.5,4174 8818.5,4174 ; 8813.5,4209 8818.5,4209 ; 8813.5,4211.5 8818.5,4211.5 ; 8813.5,4214 8818.5,4214 ; 8813.5,4216.5 8818.5,4216.5 ; 8813.5,4219 8818.5,4219 ; 8813.5,4221.5 8818.5,4221.5 ; 8813.5,4229 8821,4229 ; 8813.5,4304 8848.5,4304 ; 8813.5,4306.5 8851,4306.5 ; 8813.5,4309 8851,4309 ; 8813.5,4311.5 8851,4311.5 ; 8813.5,4314 8851,4314 ; 8813.5,4406.5 8818.5,4406.5 ; 8813.5,4474 8816,4474 ; 8813.5,4486.5 8816,4486.5 ; 8813.5,4489 8816,4489 ; 8813.5,4504 8828.5,4504 ; 8816,4066.5 8828.5,4066.5 ; 8816,4169 8821,4169 ; 8816,4224 8818.5,4224 ; 8816,4226.5 8821,4226.5 ; 8816,4231.5 8821,4231.5 ; 8816,4234 8821,4234 ; 8816,4236.5 8821,4236.5 ; 8816,4239 8821,4239 ; 8816,4241.5 8826,4241.5 ; 8816,4244 8831,4244 ; 8816,4246.5 8831,4246.5 ; 8816,4249 8833.5,4249 ; 8816,4251.5 8833.5,4251.5 ; 8816,4254 8836,4254 ; 8816,4256.5 8836,4256.5 ; 8816,4259 8838.5,4259 ; 8816,4261.5 8838.5,4261.5 ; 8816,4264 8838.5,4264 ; 8816,4266.5 8838.5,4266.5 ; 8816,4269 8838.5,4269 ; 8816,4271.5 8841,4271.5 ; 8816,4274 8841,4274 ; 8816,4276.5 8841,4276.5 ; 8816,4279 8841,4279 ; 8816,4281.5 8843.5,4281.5 ; 8816,4284 8843.5,4284 ; 8816,4286.5 8843.5,4286.5 ; 8816,4289 8846,4289 ; 8816,4291.5 8846,4291.5 ; 8816,4294 8846,4294 ; 8816,4296.5 8848.5,4296.5 ; 8816,4299 8848.5,4299 ; 8816,4301.5 8848.5,4301.5 ; 8816,4409 8818.5,4409 ; 8816,4454 8826,4454 ; 8816,4506.5 8826,4506.5 ; 8818.5,4166.5 8823.5,4166.5 ; 8818.5,4196.5 8823.5,4196.5 ; 8818.5,4496.5 8836,4496.5 ; 8818.5,4499 8823.5,4499 ; 8818.5,4501.5 8821,4501.5 ; 8821,4064 8838.5,4064 ; 8821,4161.5 8826,4161.5 ; 8821,4164 8826,4164 ; 8821,4199 8823.5,4199 ; 8821,4201.5 8826,4201.5 ; 8821,4451.5 8828.5,4451.5 ; 8821,4494 8831,4494 ; 8823.5,4159 8828.5,4159 ; 8823.5,4204 8826,4204 ; 8823.5,4206.5 8826,4206.5 ; 8823.5,4209 8828.5,4209 ; 8823.5,4211.5 8828.5,4211.5 ; 8823.5,4214 8828.5,4214 ; 8823.5,4216.5 8828.5,4216.5 ; 8823.5,4219 8828.5,4219 ; 8823.5,4221.5 8828.5,4221.5 ; 8823.5,4224 8828.5,4224 ; 8823.5,4226.5 8828.5,4226.5 ; 8823.5,4409 8838.5,4409 ; 8826,4154 8833.5,4154 ; 8826,4156.5 8831,4156.5 ; 8826,4229 8828.5,4229 ; 8826,4231.5 8831,4231.5 ; 8826,4234 8831,4234 ; 8826,4236.5 8831,4236.5 ; 8826,4239 8831,4239 ; 8826,4446.5 8831,4446.5 ; 8826,4449 8831,4449 ; 8826,4476.5 8836,4476.5 ; 8826,4501.5 8843.5,4501.5 ; 8828.5,4061.5 8843.5,4061.5 ; 8828.5,4151.5 8833.5,4151.5 ; 8828.5,4241.5 8831,4241.5 ; 8828.5,4444 8833.5,4444 ; 8828.5,4499 8843.5,4499 ; 8831,4149 8836,4149 ; 8831,4441.5 8836,4441.5 ; 8831,4474 8841,4474 ; 8833.5,4066.5 8838.5,4066.5 ; 8833.5,4144 8841,4144 ; 8833.5,4146.5 8838.5,4146.5 ; 8833.5,4406.5 8843.5,4406.5 ; 8833.5,4439 8838.5,4439 ; 8836,4059 8851,4059 ; 8836,4069 8838.5,4069 ; 8836,4071.5 8841,4071.5 ; 8836,4074 8841,4074 ; 8836,4076.5 8841,4076.5 ; 8836,4141.5 8843.5,4141.5 ; 8836,4436.5 8841,4436.5 ; 8838.5,4079 8843.5,4079 ; 8838.5,4081.5 8843.5,4081.5 ; 8838.5,4084 8843.5,4084 ; 8838.5,4139 8843.5,4139 ; 8838.5,4471.5 8846,4471.5 ; 8838.5,4504 8843.5,4504 ; 8841,4004 8843.5,4004 ; 8841,4086.5 8846,4086.5 ; 8841,4089 8846,4089 ; 8841,4091.5 8846,4091.5 ; 8841,4136.5 8846,4136.5 ; 8841,4404 8848.5,4404 ; 8841,4434 8846,4434 ; 8841,4469 8851,4469 ; 8841,4506.5 8843.5,4506.5 ; 8843.5,4006.5 8846,4006.5 ; 8843.5,4009 8846,4009 ; 8843.5,4011.5 8848.5,4011.5 ; 8843.5,4056.5 8851,4056.5 ; 8843.5,4094 8848.5,4094 ; 8843.5,4096.5 8848.5,4096.5 ; 8843.5,4134 8848.5,4134 ; 8843.5,4431.5 8848.5,4431.5 ; 8843.5,4511.5 8858.5,4511.5 ; 8846,4014 8848.5,4014 ; 8846,4016.5 8848.5,4016.5 ; 8846,4019 8851,4019 ; 8846,4021.5 8851,4021.5 ; 8846,4024 8851,4024 ; 8846,4026.5 8851,4026.5 ; 8846,4099 8851,4099 ; 8846,4101.5 8851,4101.5 ; 8846,4104 8853.5,4104 ; 8846,4131.5 8851,4131.5 ; 8846,4401.5 8853.5,4401.5 ; 8846,4429 8851,4429 ; 8846,4466.5 8853.5,4466.5 ; 8848.5,4029 8851,4029 ; 8848.5,4031.5 8851,4031.5 ; 8848.5,4034 8853.5,4034 ; 8848.5,4036.5 8853.5,4036.5 ; 8848.5,4039 8853.5,4039 ; 8848.5,4041.5 8853.5,4041.5 ; 8848.5,4044 8853.5,4044 ; 8848.5,4046.5 8853.5,4046.5 ; 8848.5,4049 8853.5,4049 ; 8848.5,4051.5 8853.5,4051.5 ; 8848.5,4054 8853.5,4054 ; 8848.5,4106.5 8853.5,4106.5 ; 8848.5,4109 8853.5,4109 ; 8848.5,4129 8853.5,4129 ; 8848.5,4369 8853.5,4369 ; 8848.5,4426.5 8853.5,4426.5 ; 8848.5,4514 8856,4514 ; 8851,4111.5 8856,4111.5 ; 8851,4114 8856,4114 ; 8851,4116.5 8856,4116.5 ; 8851,4124 8866,4124 ; 8851,4126.5 8856,4126.5 ; 8851,4366.5 8856,4366.5 ; 8851,4399 8863.5,4399 ; 8851,4421.5 8856,4421.5 ; 8851,4424 8853.5,4424 ; 8851,4464 8858.5,4464 ; 8851,4496.5 8858.5,4496.5 ; 8851,4499 8853.5,4499 ; 8851,4504 8866,4504 ; 8851,4506.5 8853.5,4506.5 ; 8851,4509 8853.5,4509 ; 8853.5,4119 8858.5,4119 ; 8853.5,4121.5 8861,4121.5 ; 8853.5,4361.5 8861,4361.5 ; 8853.5,4364 8858.5,4364 ; 8853.5,4414 8858.5,4414 ; 8853.5,4416.5 8856,4416.5 ; 8853.5,4419 8856,4419 ; 8853.5,4461.5 8861,4461.5 ; 8853.5,4501.5 8868.5,4501.5 ; 8856,4359 8861,4359 ; 8856,4396.5 8866,4396.5 ; 8856,4406.5 8861,4406.5 ; 8856,4409 8858.5,4409 ; 8856,4411.5 8858.5,4411.5 ; 8856,4494 8861,4494 ; 8856,4499 8868.5,4499 ; 8856,4509 8861,4509 ; 8858.5,4321.5 8863.5,4321.5 ; 8858.5,4324 8863.5,4324 ; 8858.5,4326.5 8863.5,4326.5 ; 8858.5,4329 8863.5,4329 ; 8858.5,4331.5 8861,4331.5 ; 8858.5,4334 8861,4334 ; 8858.5,4336.5 8861,4336.5 ; 8858.5,4339 8863.5,4339 ; 8858.5,4341.5 8863.5,4341.5 ; 8858.5,4356.5 8863.5,4356.5 ; 8858.5,4401.5 8861,4401.5 ; 8858.5,4404 8861,4404 ; 8858.5,4459 8866,4459 ; 8858.5,4491.5 8866,4491.5 ; 8858.5,4506.5 8863.5,4506.5 ; 8861,4319 8866,4319 ; 8861,4344 8868.5,4344 ; 8861,4351.5 8866,4351.5 ; 8861,4354 8863.5,4354 ; 8861,4394 8866,4394 ; 8861,4456.5 8868.5,4456.5 ; 8863.5,4126.5 8871,4126.5 ; 8863.5,4316.5 8868.5,4316.5 ; 8863.5,4346.5 8868.5,4346.5 ; 8863.5,4349 8866,4349 ; 8863.5,4489 8868.5,4489 ; 8866,4314 8871,4314 ; 8866,4341.5 8871,4341.5 ; 8866,4454 8873.5,4454 ; 8866,4486.5 8871,4486.5 ; 8866,4496.5 8871,4496.5 ; 8868.5,4129 8873.5,4129 ; 8868.5,4311.5 8878.5,4311.5 ; 8868.5,4336.5 8873.5,4336.5 ; 8868.5,4339 8873.5,4339 ; 8868.5,4451.5 8876,4451.5 ; 8868.5,4484 8881,4484 ; 8868.5,4494 8873.5,4494 ; 8871,4131.5 8878.5,4131.5 ; 8871,4309 8881,4309 ; 8871,4334 8876,4334 ; 8871,4481.5 8881,4481.5 ; 8871,4491.5 8876,4491.5 ; 8873.5,4134 8881,4134 ; 8873.5,4306.5 8881,4306.5 ; 8873.5,4314 8878.5,4314 ; 8873.5,4316.5 8878.5,4316.5 ; 8873.5,4319 8878.5,4319 ; 8873.5,4321.5 8878.5,4321.5 ; 8873.5,4324 8878.5,4324 ; 8873.5,4326.5 8878.5,4326.5 ; 8873.5,4329 8878.5,4329 ; 8873.5,4331.5 8876,4331.5 ; 8873.5,4449 8878.5,4449 ; 8873.5,4489 8878.5,4489 ; 8876,4304 8881,4304 ; 8876,4446.5 8881,4446.5 ; 8876,4479 8881,4479 ; 8876,4486.5 8881,4486.5 ; 8878.5,4136.5 8883.5,4136.5 ; 8878.5,4296.5 8883.5,4296.5 ; 8878.5,4299 8883.5,4299 ; 8878.5,4301.5 8881,4301.5 ; 8878.5,4441.5 8883.5,4441.5 ; 8878.5,4444 8883.5,4444 ; 8878.5,4476.5 8886,4476.5 ; 8881,4139 8888.5,4139 ; 8881,4291.5 8886,4291.5 ; 8881,4294 8883.5,4294 ; 8881,4436.5 8886,4436.5 ; 8881,4439 8886,4439 ; 8881,4474 8888.5,4474 ; 8883.5,4141.5 8903.5,4141.5 ; 8883.5,4286.5 8886,4286.5 ; 8883.5,4289 8886,4289 ; 8883.5,4431.5 8888.5,4431.5 ; 8883.5,4434 8886,4434 ; 8883.5,4471.5 8891,4471.5 ; 8886,4144 8901,4144 ; 8886,4279 8888.5,4279 ; 8886,4281.5 8888.5,4281.5 ; 8886,4284 8888.5,4284 ; 8886,4426.5 8891,4426.5 ; 8886,4429 8888.5,4429 ; 8888.5,4269 8893.5,4269 ; 8888.5,4271.5 8891,4271.5 ; 8888.5,4274 8891,4274 ; 8888.5,4276.5 8891,4276.5 ; 8888.5,4419 8893.5,4419 ; 8888.5,4421.5 8891,4421.5 ; 8888.5,4424 8891,4424 ; 8888.5,4469 8893.5,4469 ; 8891,4264 8896,4264 ; 8891,4266.5 8893.5,4266.5 ; 8891,4414 8896,4414 ; 8891,4416.5 8893.5,4416.5 ; 8891,4466.5 8896,4466.5 ; 8893.5,4261.5 8898.5,4261.5 ; 8893.5,4409 8896,4409 ; 8893.5,4411.5 8896,4411.5 ; 8893.5,4461.5 8898.5,4461.5 ; 8893.5,4464 8898.5,4464 ; 8896,4259 8901,4259 ; 8896,4404 8898.5,4404 ; 8896,4406.5 8898.5,4406.5 ; 8896,4454 8901,4454 ; 8896,4456.5 8901,4456.5 ; 8896,4459 8901,4459 ; 8898.5,4139 8908.5,4139 ; 8898.5,4399 8903.5,4399 ; 8898.5,4401.5 8901,4401.5 ; 8898.5,4446.5 8903.5,4446.5 ; 8898.5,4449 8903.5,4449 ; 8898.5,4451.5 8903.5,4451.5 ; 8901,4256.5 8906,4256.5 ; 8901,4396.5 8906,4396.5 ; 8901,4439 8906,4439 ; 8901,4441.5 8906,4441.5 ; 8901,4444 8903.5,4444 ; 8903.5,4136.5 8913.5,4136.5 ; 8903.5,4394 8908.5,4394 ; 8903.5,4429 8908.5,4429 ; 8903.5,4431.5 8908.5,4431.5 ; 8903.5,4434 8908.5,4434 ; 8903.5,4436.5 8906,4436.5 ; 8906,4254 8913.5,4254 ; 8906,4391.5 8911,4391.5 ; 8906,4419 8911,4419 ; 8906,4421.5 8911,4421.5 ; 8906,4424 8911,4424 ; 8906,4426.5 8908.5,4426.5 ; 8908.5,4134 8918.5,4134 ; 8908.5,4389 8913.5,4389 ; 8908.5,4411.5 8913.5,4411.5 ; 8908.5,4414 8913.5,4414 ; 8908.5,4416.5 8913.5,4416.5 ; 8911,4251.5 8918.5,4251.5 ; 8911,4386.5 8916,4386.5 ; 8911,4404 8916,4404 ; 8911,4406.5 8916,4406.5 ; 8911,4409 8916,4409 ; 8913.5,4131.5 8923.5,4131.5 ; 8913.5,4399 8918.5,4399 ; 8913.5,4401.5 8918.5,4401.5 ; 8916,4249 8921,4249 ; 8916,4394 8921,4394 ; 8916,4396.5 8921,4396.5 ; 8918.5,4091.5 8921,4091.5 ; 8918.5,4094 8921,4094 ; 8918.5,4129 8928.5,4129 ; 8918.5,4246.5 8923.5,4246.5 ; 8918.5,4389 8923.5,4389 ; 8918.5,4391.5 8923.5,4391.5 ; 8921,4081.5 8926,4081.5 ; 8921,4084 8923.5,4084 ; 8921,4086.5 8923.5,4086.5 ; 8921,4089 8923.5,4089 ; 8921,4244 8926,4244 ; 8921,4384 8926,4384 ; 8921,4386.5 8926,4386.5 ; 8923.5,4071.5 8928.5,4071.5 ; 8923.5,4074 8928.5,4074 ; 8923.5,4076.5 8926,4076.5 ; 8923.5,4079 8926,4079 ; 8923.5,4126.5 8953.5,4126.5 ; 8923.5,4241.5 8928.5,4241.5 ; 8923.5,4379 8928.5,4379 ; 8923.5,4381.5 8928.5,4381.5 ; 8926,4064 8931,4064 ; 8926,4066.5 8931,4066.5 ; 8926,4069 8928.5,4069 ; 8926,4236.5 8931,4236.5 ; 8926,4239 8931,4239 ; 8926,4376.5 8931,4376.5 ; 8928.5,4056.5 8933.5,4056.5 ; 8928.5,4059 8933.5,4059 ; 8928.5,4061.5 8931,4061.5 ; 8928.5,4124 8946,4124 ; 8928.5,4234 8933.5,4234 ; 8928.5,4371.5 8933.5,4371.5 ; 8928.5,4374 8933.5,4374 ; 8931,4046.5 8936,4046.5 ; 8931,4049 8936,4049 ; 8931,4051.5 8936,4051.5 ; 8931,4054 8933.5,4054 ; 8931,4229 8936,4229 ; 8931,4231.5 8936,4231.5 ; 8931,4366.5 8936,4366.5 ; 8931,4369 8936,4369 ; 8933.5,4039 8938.5,4039 ; 8933.5,4041.5 8938.5,4041.5 ; 8933.5,4044 8936,4044 ; 8933.5,4226.5 8938.5,4226.5 ; 8933.5,4364 8938.5,4364 ; 8936,4031.5 8941,4031.5 ; 8936,4034 8941,4034 ; 8936,4036.5 8938.5,4036.5 ; 8936,4221.5 8941,4221.5 ; 8936,4224 8941,4224 ; 8936,4359 8941,4359 ; 8936,4361.5 8941,4361.5 ; 8938.5,4024 8943.5,4024 ; 8938.5,4026.5 8943.5,4026.5 ; 8938.5,4029 8941,4029 ; 8938.5,4219 8943.5,4219 ; 8938.5,4356.5 8943.5,4356.5 ; 8941,4016.5 8946,4016.5 ; 8941,4019 8946,4019 ; 8941,4021.5 8943.5,4021.5 ; 8941,4214 8946,4214 ; 8941,4216.5 8946,4216.5 ; 8941,4351.5 8946,4351.5 ; 8941,4354 8946,4354 ; 8943.5,4009 8948.5,4009 ; 8943.5,4011.5 8948.5,4011.5 ; 8943.5,4014 8946,4014 ; 8943.5,4209 8948.5,4209 ; 8943.5,4211.5 8948.5,4211.5 ; 8943.5,4346.5 8948.5,4346.5 ; 8943.5,4349 8948.5,4349 ; 8946,4004 8951,4004 ; 8946,4006.5 8948.5,4006.5 ; 8946,4129 8958.5,4129 ; 8946,4204 8951,4204 ; 8946,4206.5 8951,4206.5 ; 8946,4341.5 8951,4341.5 ; 8946,4344 8951,4344 ; 8948.5,3996.5 8953.5,3996.5 ; 8948.5,3999 8951,3999 ; 8948.5,4001.5 8951,4001.5 ; 8948.5,4199 8953.5,4199 ; 8948.5,4201.5 8953.5,4201.5 ; 8948.5,4339 8953.5,4339 ; 8951,3994 8953.5,3994 ; 8951,4194 8956,4194 ; 8951,4196.5 8956,4196.5 ; 8951,4334 8956,4334 ; 8951,4336.5 8953.5,4336.5 ; 8953.5,4131.5 8966,4131.5 ; 8953.5,4189 8958.5,4189 ; 8953.5,4191.5 8958.5,4191.5 ; 8953.5,4326.5 8958.5,4326.5 ; 8953.5,4329 8958.5,4329 ; 8953.5,4331.5 8956,4331.5 ; 8956,4184 8961,4184 ; 8956,4186.5 8958.5,4186.5 ; 8956,4324 8961,4324 ; 8958.5,4176.5 8978.5,4176.5 ; 8958.5,4179 9021,4179 ; 8958.5,4181.5 8961,4181.5 ; 8958.5,4319 8963.5,4319 ; 8958.5,4321.5 8961,4321.5 ; 8961,4134 8973.5,4134 ; 8961,4166.5 8966,4166.5 ; 8961,4169 8966,4169 ; 8961,4171.5 8966,4171.5 ; 8961,4174 8966,4174 ; 8961,4316.5 8966,4316.5 ; 8963.5,4154 8968.5,4154 ; 8963.5,4156.5 8968.5,4156.5 ; 8963.5,4159 8968.5,4159 ; 8963.5,4161.5 8968.5,4161.5 ; 8963.5,4164 8968.5,4164 ; 8963.5,4311.5 8971,4311.5 ; 8963.5,4314 8968.5,4314 ; 8966,4141.5 8971,4141.5 ; 8966,4144 8971,4144 ; 8966,4146.5 8971,4146.5 ; 8966,4149 8971,4149 ; 8966,4151.5 8971,4151.5 ; 8966,4309 8973.5,4309 ; 8968.5,4129 8973.5,4129 ; 8968.5,4131.5 8973.5,4131.5 ; 8968.5,4136.5 8973.5,4136.5 ; 8968.5,4139 8973.5,4139 ; 8968.5,4306.5 8973.5,4306.5 ; 8971,4119 8976,4119 ; 8971,4121.5 8976,4121.5 ; 8971,4124 8976,4124 ; 8971,4126.5 8976,4126.5 ; 8971,4304 8976,4304 ; 8973.5,4109 8981,4109 ; 8973.5,4111.5 8978.5,4111.5 ; 8973.5,4114 8978.5,4114 ; 8973.5,4116.5 8978.5,4116.5 ; 8973.5,4301.5 8978.5,4301.5 ; 8976,4099 8983.5,4099 ; 8976,4101.5 8981,4101.5 ; 8976,4104 8981,4104 ; 8976,4106.5 8981,4106.5 ; 8976,4296.5 8981,4296.5 ; 8976,4299 8981,4299 ; 8978.5,4091.5 8983.5,4091.5 ; 8978.5,4094 8983.5,4094 ; 8978.5,4096.5 8983.5,4096.5 ; 8978.5,4294 8983.5,4294 ; 8981,4081.5 8988.5,4081.5 ; 8981,4084 8986,4084 ; 8981,4086.5 8986,4086.5 ; 8981,4089 8986,4089 ; 8981,4289 8986,4289 ; 8981,4291.5 8986,4291.5 ; 8983.5,4074 8988.5,4074 ; 8983.5,4076.5 8988.5,4076.5 ; 8983.5,4079 8988.5,4079 ; 8983.5,4286.5 8988.5,4286.5 ; 8986,4066.5 8991,4066.5 ; 8986,4069 8991,4069 ; 8986,4071.5 8991,4071.5 ; 8986,4284 8991,4284 ; 8988.5,4061.5 8993.5,4061.5 ; 8988.5,4064 8991,4064 ; 8988.5,4281.5 8993.5,4281.5 ; 8991,4059 8993.5,4059 ; 8991,4181.5 9051,4181.5 ; 8991,4279 8996,4279 ; 8993.5,4276.5 8998.5,4276.5 ; 8996,4271.5 9001,4271.5 ; 8996,4274 9001,4274 ; 8998.5,4269 9003.5,4269 ; 9001,4266.5 9006,4266.5 ; 9003.5,4264 9008.5,4264 ; 9006,4261.5 9011,4261.5 ; 9008.5,4259 9013.5,4259 ; 9011,4256.5 9016,4256.5 ; 9013.5,4254 9016,4254 ; 9016,4251.5 9018.5,4251.5 ; 9018.5,4246.5 9023.5,4246.5 ; 9018.5,4249 9021,4249 ; 9021,4244 9026,4244 ; 9023.5,4184 9063.5,4184 ; 9023.5,4241.5 9028.5,4241.5 ; 9026,4239 9031,4239 ; 9028.5,4236.5 9033.5,4236.5 ; 9031,4231.5 9036,4231.5 ; 9031,4234 9036,4234 ; 9033.5,4229 9038.5,4229 ; 9036,4226.5 9041,4226.5 ; 9041,4224 9048.5,4224 ; 9043.5,4221.5 9076,4221.5 ; 9046,4219 9048.5,4219 ; 9048.5,4186.5 9071,4186.5 ; 9048.5,4214 9053.5,4214 ; 9048.5,4216.5 9051,4216.5 ; 9051,4211.5 9053.5,4211.5 ; 9053.5,4209 9056,4209 ; 9056,4206.5 9058.5,4206.5 ; 9058.5,4204 9061,4204 ; 9061,4201.5 9063.5,4201.5 ; 9061,4219 9091,4219 ; 9063.5,4189 9076,4189 ; 9063.5,4199 9066,4199 ; 9066,4196.5 9068.5,4196.5 ; 9068.5,4191.5 9078.5,4191.5 ; 9068.5,4194 9071,4194 ; 9073.5,4194 9083.5,4194 ; 9078.5,4196.5 9086,4196.5 ; 9081,4199 9088.5,4199 ; 9081,4216.5 9096,4216.5 ; 9083.5,4201.5 9091,4201.5 ; 9088.5,4204 9098.5,4204 ; 9091,4206.5 9098.5,4206.5 ; 9091,4209 9098.5,4209 ; 9091,4214 9098.5,4214 ; 9093.5,4194 9098.5,4194 ; 9093.5,4196.5 9098.5,4196.5 ; 9093.5,4199 9098.5,4199 ; 9093.5,4201.5 9098.5,4201.5 ; 9093.5,4211.5 9098.5,4211.5 ; 9096,4189 9103.5,4189 ; 9096,4191.5 9101,4191.5 ; 9098.5,4186.5 9103.5,4186.5 ; 9101,4181.5 9106,4181.5 ; 9101,4184 9106,4184 ; 9103.5,4176.5 9111,4176.5 ; 9103.5,4179 9108.5,4179 ; 9106,4174 9111,4174 ; 9108.5,4169 9116,4169 ; 9108.5,4171.5 9113.5,4171.5 ; 9111,4166.5 9116,4166.5 ; 9113.5,4164 9118.5,4164 ; 9116,4159 9121,4159 ; 9116,4161.5 9121,4161.5 ; 9118.5,4156.5 9123.5,4156.5 ; 9121,4151.5 9128.5,4151.5 ; 9121,4154 9126,4154 ; 9123.5,4149 9128.5,4149 ; 9126,4146.5 9128.5,4146.5
  Top Layer w20: 9093,4377.97 cw(c9093.9,4436.99) 9093,4496
  Top Layer w30: 7163,2756 7164,2755 ; 7482,2679 7482,2681 ; 7482,3638 7483,3639